# Altium PCB control.PcbDoc
Units mm, origin at the board's own origin, x right, y up, seen from the top; angles counter-clockwise.
Board outline 64.25 x 89.45 mm, 2 copper layers (Top Layer, Bottom Layer), stack 1.569 mm thick; 78 components, 61 nets, 284 pads, 134 vias.
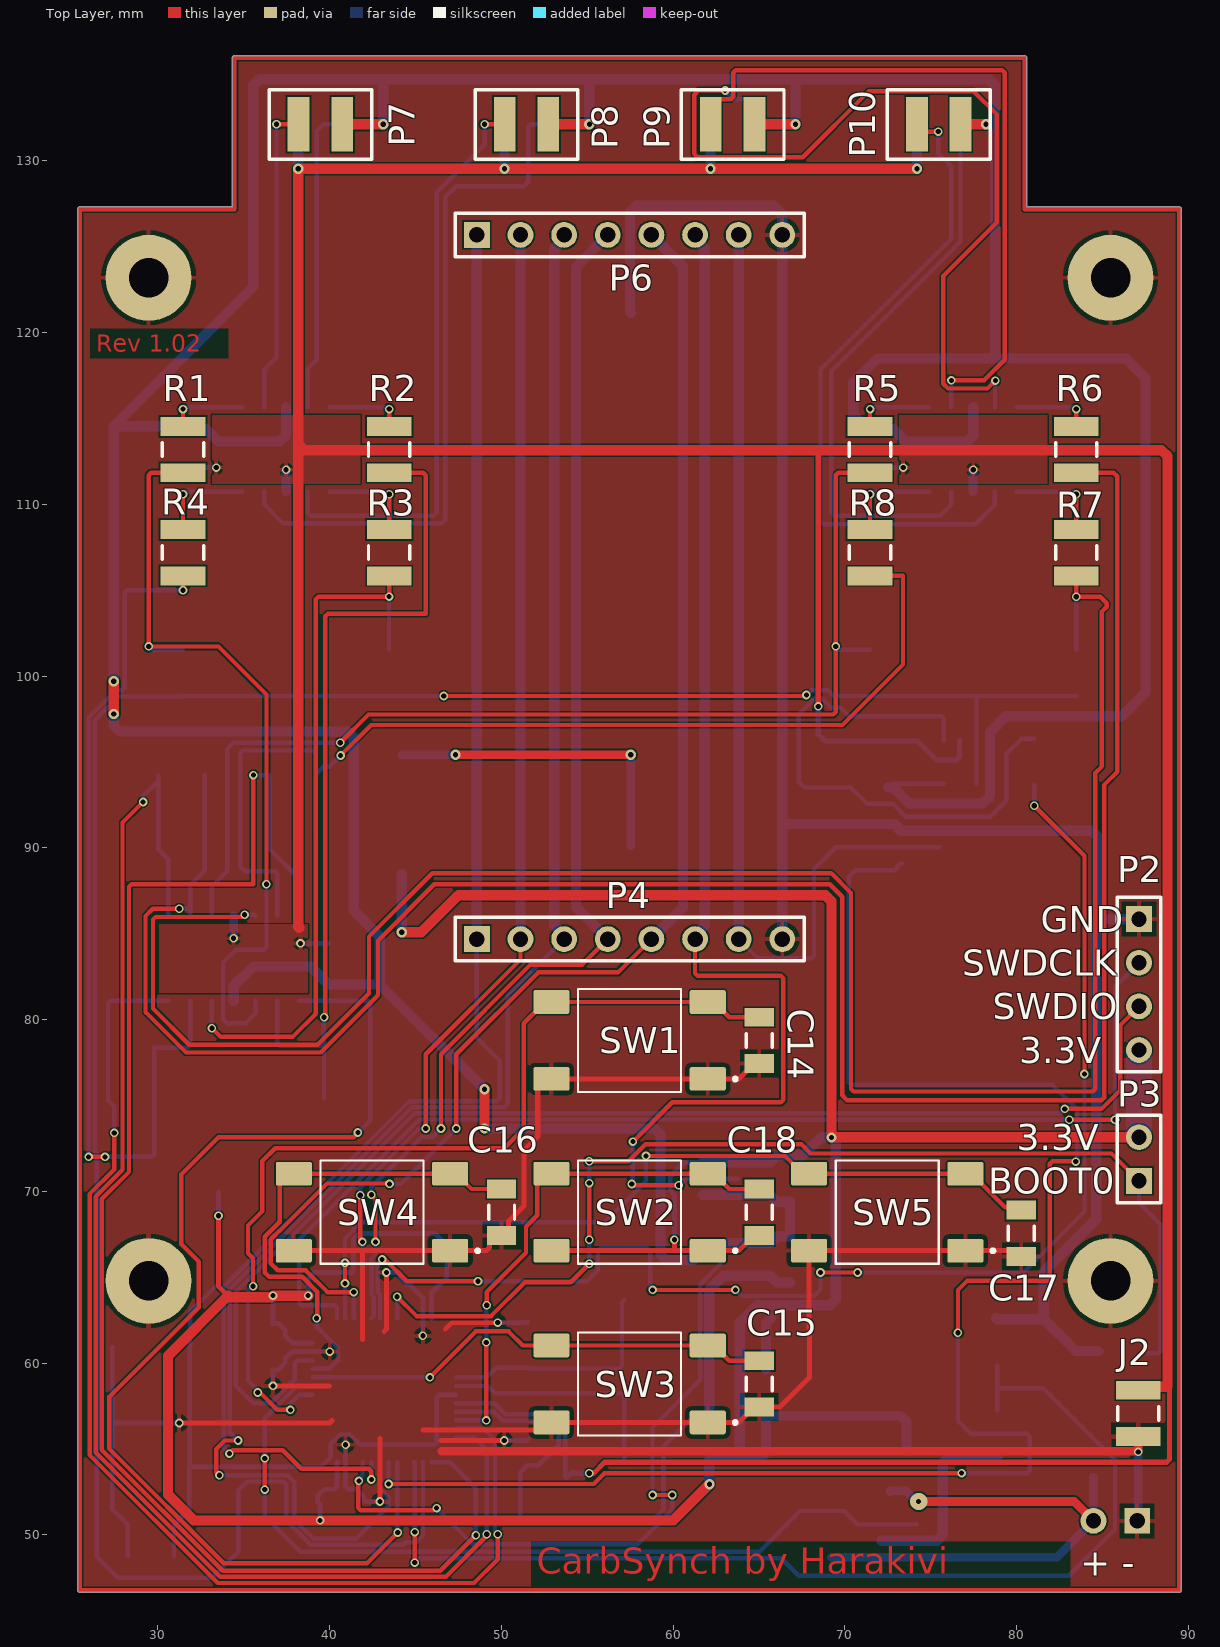
[diagram p0: Top Layer view]
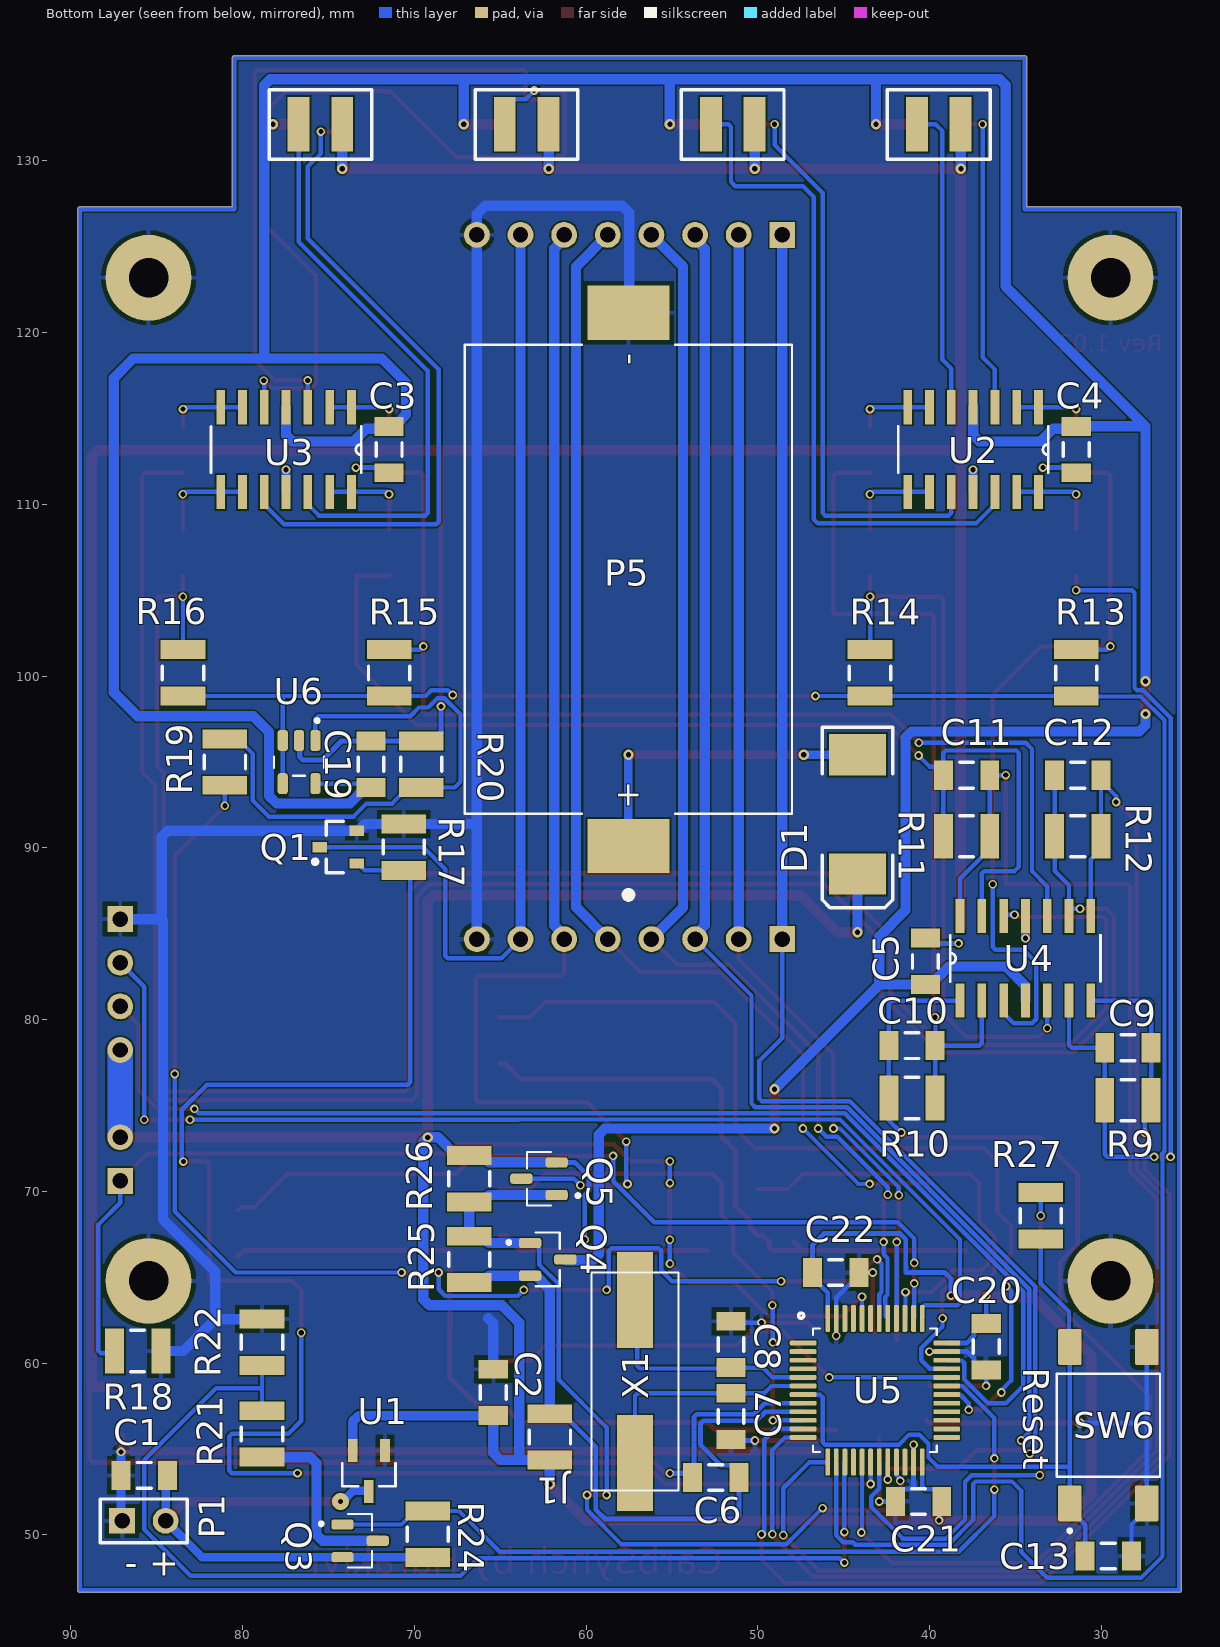
[diagram p1: Bottom Layer view, seen from below]

## Layer stack, top to bottom
Top Solder: solder mask 0.0254, SM-002, Dk 4
Top Layer: signal copper 0.035
Dielectric 1: core 1.4986, Core-043, Dk 4.3
Bottom Layer: signal copper 0.035
Bottom Solder: solder mask 0.0254, SM-002, Dk 4

## Board outline
25.337,46.79 25.337,127.19 cw(c25.464,127.19) 25.464,127.317 34.337,127.317 34.337,135.99 cw(c34.464,135.99) 34.464,136.117 80.464,136.117 cw(c80.464,135.99) 80.591,135.99 80.591,127.317 89.464,127.317 cw(c89.464,127.19) 89.591,127.19 89.591,46.79 cw(c89.464,46.79) 89.464,46.663 25.464,46.663 cw(c25.464,46.79)

## Design rules (kind name [scope] priority, off if disabled: settings)
Clearance [All] p1: gap=0.1 ignorepadtopadclearanceinfootprint=TRUE
DiffPairsRouting [All] p1: maxlimit=1 minlimit=0.1 mostfreqgap=0.254 toplayer_minwidth=0.1 toplayer_maxwidth=1 toplayer_prefwidth=0.381 bottomlayer_minwidth=0.1 bottomlayer_maxwidth=1 bottomlayer_prefwidth=0.381 maxuncoupledlength=12.7
PolygonConnect [All] p1: connectstyle=Relief reliefconductorwidth=0.254 reliefentries=4 polygonreliefangle="90 Angle" airgapwidth=0.254
RoomDefinition control [InComponentClass('control')] p1: confinementstyle=ConfineIn formatcopy=TRUE lockcomponents=FALSE outline 25.4,46.736 89.535,46.736 89.535,135.99 25.4,135.99
RoutingVias [All] p1: holewidth=0.254 width=0.7 viastyle="Through Hole" minholewidth=0.1 minwidth=0.1 maxholewidth=0.711 maxwidth=1.27
SilkToSilkClearance [All] p1: silktosilkclearance=0.1
SolderMaskExpansion [All] p1: expansion=0.102 istentingtop=FALSE
Width Width_V3.3 [InNet('V3.3')] p1: maxlimit=1.5 minlimit=0.1 preferedwidth=0.7 bottomlayer_prefwidth=0.254 minimp=50.000000 maximp=50.000000 favimp=50.000000
Width Width_GND [InNet('GND')] p2: maxlimit=1.5 minlimit=0.1 preferedwidth=0.7 bottomlayer_prefwidth=0.254 minimp=50.000000 maximp=50.000000 favimp=50.000000
Width [All] p3: maxlimit=1.5 minlimit=0.1 preferedwidth=0.254
28 further rules are at their usual default settings.

## Components (designator, comment, footprint, x,y, rotation, side; value= is the part's Value field where it differs from the comment)
C1 "Cap Semi" C1206 85.725,53.467 r180 bottom value=10uF
C2 "Cap Semi" C1206 65.405,58.293 r270 bottom value=1uF
C3 "Cap Semi" C1206 71.464,113.19 r90 bottom locked value=10uF
C4 "Cap Semi" C1206 31.464,113.19 r90 bottom locked value=10uF
C5 "Cap Semi" C1206 40.243,83.392 r270 bottom value=10uF
C6 "Cap Semi" C1206 52.451,53.34 r180 bottom value=10uF
C7 "Cap Semi" C1206 51.562,56.896 r90 bottom value=12pF
C8 "Cap Semi" C1206 51.562,61.087 r270 bottom value=12pF
C9 "Cap Semi" C1206 28.448,78.359 r0 bottom value=100pF
C10 "Cap Semi" C1206 41.021,78.486 r180 bottom value=100pF
C11 "Cap Semi" C1206 37.846,94.234 r0 bottom value=100pF
C12 "Cap Semi" C1206 31.369,94.234 r0 bottom value=100pF
C13 "Cap Semi" C1206 29.591,48.768 r0 bottom value=100nF
C14 "Cap Semi" C1206 65.014,78.79 r90 top locked value=100nF
C15 "Cap Semi" C1206 65.014,58.79 r90 top locked value=100nF
C16 "Cap Semi" C1206 50.014,68.79 r90 top locked value=100nF
C17 "Cap Semi" C1206 80.264,67.564 r90 top value=100nF
C18 "Cap Semi" C1206 65.014,68.79 r90 top locked value=100nF
C19 "Cap Semi" C1206 72.517,94.869 r90 bottom value=10uF
C20 "Cap Semi" C1206 36.703,60.96 r90 bottom value=10uF
C21 "Cap Semi" C1206 40.64,51.943 r180 bottom value=10uF
C22 "Cap Semi" C1206 45.466,65.278 r0 bottom value=10uF
D1 "Diode" SMC 44.196,91.948 r270 bottom
J1 "Res3" 14-1210 62.105,55.706 r90 bottom value=0
J2 "Res3" 14-1210 87.075,57.073 r270 top value=0
P1 "BatteryCon" HDR1X2 87.015,50.82 r180 bottom
P2 "Debug" HDR1X4 87.122,85.852 r270 top
P3 "BOOT0" HDR1X2 87.122,70.612 r90 top
P4 "DisplayPort" HDR1X8 48.574,84.69 r0 top locked
P5 "796136-1" TE_796136-1 57.531,105.638 r90 bottom locked
P6 "DisplayPort" HDR1X8 48.574,125.69 r0 top locked
P7 "Conn" CONNFOOT 40.733,132.128 r0 top locked
P8 "Conn" CONNFOOT 52.733,132.128 r0 top locked
P9 "Conn" CONNFOOT 64.733,132.128 r0 top locked
P10 "Conn" CONNFOOT 76.733,132.128 r0 top locked
Q1 "IRLML0030TRPBF" SOT23_L 74.422,90.043 r0 bottom
Q3 "IRLML9301TRPBF" SOT95P237X112-3N 73.152,49.657 r180 bottom
Q4 "IRLML9301TRPBF" SOT95P237X112-3N 62.23,66.04 r180 bottom
Q5 "IRLML9301TRPBF" SOT95P237X112-3N 62.738,70.739 r0 bottom
R1 "Res3" 14-1210 31.464,113.19 r90 top locked value=1K
R2 "Res3" 14-1210 43.464,113.19 r90 top locked value=1K
R3 "Res3" 14-1210 43.464,107.19 r90 top locked value=1K
R4 "Res3" 14-1210 31.464,107.19 r90 top locked value=1K
R5 "Res3" 14-1210 71.464,113.19 r90 top locked value=1K
R6 "Res3" 14-1210 83.464,113.19 r90 top locked value=1K
R7 "Res3" 14-1210 83.464,107.19 r90 top locked value=1K
R8 "Res3" 14-1210 71.464,107.19 r90 top locked value=1K
R9 "Res3" 14-1210 28.448,75.311 r0 bottom value=1K
R10 "Res3" 14-1210 41.021,75.438 r180 bottom value=1K
R11 "Res3" 14-1210 37.846,90.678 r0 bottom value=1K
R12 "Res3" 14-1210 31.369,90.678 r0 bottom value=1K
R13 "Res3" 14-1210 31.464,100.19 r90 bottom value=1k
R14 "Res3" 14-1210 43.464,100.19 r90 bottom value=1k
R15 "Res3" 14-1210 71.464,100.19 r90 bottom value=1k
R16 "Res3" 14-1210 83.464,100.19 r270 bottom value=1k
R17 "Res3" 14-1210 70.612,90.043 r270 bottom value=10k
R18 "Res3" 14-1210 86.106,60.706 r0 bottom value=100k
R19 "Res3" 14-1210 81.026,94.996 r270 bottom value=10k
R20 "Res3" 14-1210 69.596,94.869 r270 bottom value=10k
R21 "Res3" 14-1210 78.867,55.88 r270 bottom value=50K
R22 "Res3" 14-1210 78.867,61.214 r270 bottom value=50K
R24 "Res3" 14-1210 69.215,50.038 r90 bottom value=10k
R25 "Res3" 14-1210 66.802,66.04 r90 bottom value=10k
R26 "Res3" 14-1210 66.802,70.739 r270 bottom value=10k
R27 "Res3" 14-1210 33.528,68.58 r270 bottom value=10k
SW1 "Up" TE_FSM4JSMA 57.464,78.79 r180 top locked
SW2 "Enter" TE_FSM4JSMA 57.464,68.79 r180 top locked
SW3 "Down" TE_FSM4JSMA 57.464,58.79 r180 top locked
SW4 "Left" TE_FSM4JSMA 42.464,68.79 r180 top locked
SW5 "Right" TE_FSM4JSMA 72.464,68.79 r180 top locked
SW6 "Reset" TE_FSM4JSMA 29.591,56.388 r90 bottom locked
U1 "MCP1702T-3302E/CB" SOT95P255X145-3N 72.644,53.721 r0 bottom
U2 "LM324AD" SOIC127P600X175-14N 37.464,113.19 r270 bottom locked
U3 "LM324AD" SOIC127P600X175-14N 77.464,113.19 r270 bottom locked
U4 "LM324AD" SOIC127P600X175-14N 34.417,83.566 r90 bottom
U5 "STM32F103C8T6" QFP50P900X900X160-48N 43.18,58.42 r180 bottom locked
U6 "LMV321M5" SOT95P280X145-5N 76.708,94.996 r270 bottom
X1 "ABLS-8.000MHZ-B4-T" HC-49/US 57.15,58.928 r270 bottom

## Footprints (in the part's own frame and the unit in brackets; to place one, negate y for a bottom-side part, rotate by r counter-clockwise, add the part's x,y. Pads: shape width x height; smd on the part's side, far side on the other; paste and mask are expansions set on the pad)
14-1210 [mm] "Chip Resistor, Body 3.2x2.5mm, IPC High Density"
  rect 1.1x2.6 smd: 1(-1.35,0) 2(1.35,0)
  silkscreen extent -0.4,-1.2 0.4,1.2, body extent -1.68,-1.32 1.68,1.32, height 0.9
C1206 [mm] "Chip Capacitor, Body 3.2x1.6mm, IPC High Density"
  rect 1.1x1.7 smd: 1(-1.35,0) 2(1.35,0)
  silkscreen extent -0.4,-0.75 0.4,0.75, body extent -1.7,-0.9 1.7,0.9, height 1.3
CONNFOOT [mm]
  rect 1.27x3.18 smd: 1(-2.54,0) 2(0,0)
  rect 1.27x3.18 smd far side: 3(-2.54,0) 4(0,0)
  silkscreen extent -4.26,-2.04 1.72,2.02
HC-49/US [mil]
  rect 220x83 smd: P$1(187,0) P$2(-187,0)
  silkscreen extent -250,-100 250,100
HDR1X2 [mm] "Connector; Header; 2 Position"
  rect 1.5x1.5 hole 0.9: 1(0,0)
  round 1.5 hole 0.9: 2(2.54,0)
  silkscreen extent -1.27,-1.27 3.81,1.27
HDR1X4 [mm] "Connector; Header; 4 Position"
  rect 1.5x1.5 hole 0.9: 1(0,0)
  round 1.5 hole 0.9: 2(2.54,0) 3(5.08,0) 4(7.62,0)
  silkscreen extent -1.27,-1.27 8.89,1.27
HDR1X8 [mm] "Connector; Header; 8 Position"
  rect 1.5x1.5 hole 0.9: 1(0,0)
  round 1.5 hole 0.9: 2(2.54,0) 3(5.08,0) 4(7.62,0) 5(10.16,0) 6(12.7,0) 7(15.24,0) 8(17.78,0)
  silkscreen extent -1.27,-1.27 19.05,1.27
QFP50P900X900X160-48N [mm]
  rrect50% 1.56x0.28 smd: 1(-4.18,2.75) 2(-4.18,2.25) 3(-4.18,1.75) 4(-4.18,1.25) 5(-4.18,0.75) 6(-4.18,0.25) 7(-4.18,-0.25) 8(-4.18,-0.75) 9(-4.18,-1.25) 10(-4.18,-1.75) 11(-4.18,-2.25) 12(-4.18,-2.75) 25(4.18,-2.75) 26(4.18,-2.25) 27(4.18,-1.75) 28(4.18,-1.25) 29(4.18,-0.75) 30(4.18,-0.25) 31(4.18,0.25) 32(4.18,0.75) 33(4.18,1.25) 34(4.18,1.75) 35(4.18,2.25) 36(4.18,2.75)
  rrect50% 0.28x1.56 smd: 13(-2.75,-4.18) 14(-2.25,-4.18) 15(-1.75,-4.18) 16(-1.25,-4.18) 17(-0.75,-4.18) 18(-0.25,-4.18) 19(0.25,-4.18) 20(0.75,-4.18) 21(1.25,-4.18) 22(1.75,-4.18) 23(2.25,-4.18) 24(2.75,-4.18) 37(2.75,4.18) 38(2.25,4.18) 39(1.75,4.18) 40(1.25,4.18) 41(0.75,4.18) 42(0.25,4.18) 43(-0.25,4.18) 44(-0.75,4.18) 45(-1.25,4.18) 46(-1.75,4.18) 47(-2.25,4.18) 48(-2.75,4.18)
  silkscreen extent -4.45,-3.6 3.6,4.49
SMC [mm] "DO-214-AB/SMC; 2 C-Bend Leads; Body 7.9 x 5.9 mm, inc. leads (LxW)"
  rect 2.4x3.3 smd: 1(-3.475,0) 2(3.475,0)
  silkscreen extent -5.07,-2.05 5.43,2.05
SOIC127P600X175-14N [mil]
  rect 78x20 smd: 1(-97,150) 2(-97,100) 3(-97,50) 4(-97,0) 5(-97,-50) 6(-97,-100) 7(-97,-150) 8(97,-150) 9(97,-100) 10(97,-50) 11(97,0) 12(97,50) 13(97,100) 14(97,150)
  silkscreen extent -53,-172 53,172
SOT23_L [mm] "SOT23, 3-Leads, Body 2.9x1.3mm, Pitch 0.95mm, Lead Span 2.3mm - Reverse Pinning, IPC High Density"
  rect 0.85x0.6 smd: 1(1.075,0) 2(-1.075,-0.95) 3(-1.075,0.95)
  silkscreen extent -0.3,-1.5 1.48,1.5, body extent -0.7,-1.5 0.7,1.5, height 1.1
SOT95P237X112-3N [mm]
  rrect50% 1.3x0.59 smd: 1(-1.025,0.95) 2(-1.025,-0.95) 3(1.025,0)
  silkscreen extent -2.37,-1.56 0.7,1.56
SOT95P255X145-3N [mil]
  rect 22x52 smd: 1(-37,-47) 2(37,-47) 3(0,47)
  silkscreen extent -61,-18 61,35
SOT95P280X145-5N [mm]
  rrect50% 1.21x0.59 smd: 1(-1.255,0.95) 2(-1.255,0) 3(-1.255,-0.95) 4(1.255,-0.95) 5(1.255,0.95)
  silkscreen extent -2.51,-1.45 0.8,1.45
TE_796136-1 [mm]
  rect 3.15x4.78 smd: 1(-15.52,0) 2(15.52,0)
  silkscreen extent -18.57,-9.53 13.65,9.53
TE_FSM4JSMA [mm]
  rrect15% 2.1x1.38 smd: 1(-4.55,2.24) 2(4.55,2.24) 3(-4.55,-2.24) 4(4.55,-2.24)
  silkscreen extent -6.25,-3 3,3, body extent -5,-3 5,3, height 7.06

## Part data
C1 C2 C3 C4 C5 C6 C7 C8 C9 C10 C11 C12 C13 C14 C15 C16 C17 C18 C19 C20 C21 C22: "Capacitor (Semiconductor SIM Model)", LatestRevisionDate=29-May-2009, LatestRevisionNote="IPC-7351 Footprint Added.", PackageDescription="Chip Capacitor", PackageReference=C1206, Published=8-Jun-2000, Publisher="Altium Limited"
D1: "Default Diode", Code_JEDEC=DO-214-AB, LatestRevisionDate=17-Jul-2002, LatestRevisionNote="Re-released for DXP Platform.", PackageDescription="DO-214-AB/SMC; 2 C-Bend Leads; Body 7.9 x 5.9 mm, inc. leads (LxW)", PackageReference=SMC, PackageVersion=Sep-1996, Published=8-Jun-2000, Publisher="Altium Limited"
J1 J2 R1 R2 R3 R4 R5 R6 R7 R8 R9 R10 R11 R12 R13 R14 R15 R16 R17 R18 R19 R20 R21 R22 R24 R25 R26 R27: "Resistor", LatestRevisionDate=29-May-2009, LatestRevisionNote="IPC-7351 Footprint Added.", PackageDescription="Chip Resistor", PackageReference=J1-0603, Published=8-Jun-2000, Publisher="Altium Limited"
P1 P3: library part "Header 2", "Header, 2-Pin", LatestRevisionDate=17-Jul-2002, LatestRevisionNote="Re-released for DXP Platform.", Publisher="Altium Limited"
P2: library part "Header 4", "Header, 4-Pin", LatestRevisionDate=17-Jul-2002, LatestRevisionNote="Re-released for DXP Platform.", Publisher="Altium Limited"
P4 P6: library part "Header 8", "Header, 8-Pin", LatestRevisionDate=17-Jul-2002, LatestRevisionNote="Re-released for DXP Platform.", Publisher="Altium Limited"
P5: "BATTERY HOLDER; No. of Batteries:1; Terminal Type:Surface Mount; For Use With:CR2032 Batteries; Accessory Type:Battery Holder; Battery Size Code:2032", Package=None, Availability=Unavailable, EU_RoHS_Compliance=Compliant, MF="TE Connectivity", MP=796136-1, Number_of_Positions=2, Price=None, SnapEDA_Link=https://www.snapeda.com/parts/796136-1/TE%20Connectivity%20AMP%20Connectors/view-part/761452/?ref=snap, TE_purchase_URL=https://www.te.com/usa-en/product-796136-1.html?te_bu=Cor&te_type=disp&te_campaign=seda_glo_cor-seda-global-disp-prtnr-fy19-seda-model-bom-cta_sma-317_1&elqCampaignId=32493
P7 P8 P9 P10: library part ConnectorSMD
Q1: "N-Channel 30V 5.3A _Ta_ 1.3W _Ta_ Surface Mount Micro3â„¢/SOT-23", Package="SOT-23 International Rectifier", Availability=Unavailable, MF="Infineon Technologies", MP=IRLML0030TRPBF, Price=None, SnapEDA_Link=https://www.snapeda.com/parts/IRLML0030TRPBF/Infineon%20Technologies/view-part/246217/?ref=snap
Q3 Q4 Q5: "RoHS Compliant", Package="SOT-23 Infineon", Availability=Unavailable, MF="Infineon Technologies", MP=IRLML9301TRPBF, Price=None, SnapEDA_Link=https://www.snapeda.com/parts/IRLML9301TRPBF/Infineon%20Technologies/view-part/2598123/?ref=snap
SW1 SW2 SW3 SW4 SW5 SW6: library part FSM4JSMA, "Tactile Switch SPST-NO Top Actuated Surface Mount", Contact_Current_Rating="50 mA", Package=None, Availability=Unavailable, Configuration_Pole-Throw="Single Pole - Single Throw", EU_RoHS_Compliance=Compliant, MF="TE Connectivity", MP=FSM4JSMA, Price=None, SnapEDA_Link=https://www.snapeda.com/parts/FSM4JSMA/TE%20Connectivity%20ALCOSWITCH%20Switches/view-part/543632/?ref=snap, TE_purchase_URL=https://www.te.com/usa-en/product-4-1437565-1.html?te_bu=Cor&te_type=disp&te_campaign=seda_glo_cor-seda-global-disp-prtnr-fy19-seda-model-bom-cta_sma-317_1&elqCampaignId=32493
U1: "Linear Voltage Regulator IC Positive Fixed 1 Output 250mA SOT-23A-3", Package=None, Availability="In Stock", Check_prices=https://www.snapeda.com/parts/MCP1702T-3302E/CB/Atmel/view-part/?ref=eda, MF="Microchip Technology", MP=MCP1702T-3302E/CB, Price=None, Purchase-URL=https://pricing.snapeda.com/search/part/MCP1702T-3302E/CB/?ref=eda, SnapEDA_Link=https://www.snapeda.com/parts/MCP1702T-3302E/CB/Atmel/view-part/?ref=snap
U2 U3 U4: "Op Amp Quad Low Power Amplifier Â±15V/30V 14-Pin SOIC Tube", Package=None, Availability=Unavailable, MF="Texas Instruments", MP=LM324AD, Price=None, SnapEDA_Link=https://www.snapeda.com/parts/LM324AD/Texas%20Instruments/view-part/4804679/?ref=snap
U5: "ARMÂ® CortexÂ®-M3 STM32F1 Microcontroller IC 32-Bit 72MHz 64KB _64K x 8_ FLASH", Package="LQFP-48 STMicroelectronics", Availability=Unavailable, MF=STMicroelectronics, MP=STM32F103C8T6, Price=None, SnapEDA_Link=https://www.snapeda.com/parts/STM32F103C8T6/STMicroelectronics/view-part/52195/?ref=snap
U6: "Single channel general purpose, low voltage, rail-to-rail output operational amplifiers 5-SOT-23 -40 to 125", Package="SOT-23-5 Texas Instruments", Arrow_Electronics-Purchase-URL=https://snapeda.com/shop?store=Arrow+Electronics&id=16808, Availability=Good, Check_prices=https://www.snapeda.com/parts/LMV321M5/NOPB/Texas%20Instruments/view-part/16808/?ref=eda, DigiKey-Purchase-URL=https://snapeda.com/shop?store=DigiKey&id=16808, MF="Texas Instruments", Mouser-Purchase-URL=https://snapeda.com/shop?store=Mouser&id=16808, MP=LMV321M5/NOPB, Price=None, SnapEDA_Link=https://www.snapeda.com/parts/LMV321M5/NOPB/Texas%20Instruments/view-part/16808/?ref=snap, Texas_Instruments-Purchase-URL=https://snapeda.com/shop?store=Texas+Instruments&id=16808
X1: "8MHz Â±30ppm Crystal 18pF 80 Ohms HC-49/US", Package="HC-49/US Abracon LLC", Availability=Unavailable, MF="Abracon LLC", MP=ABLS-8.000MHZ-B4-T, Price=None, SnapEDA_Link=https://www.snapeda.com/parts/ABLS-8.000MHZ-B4-T/Abracon%20LLC/view-part/306310/?ref=snap

## Free pads (board coordinates)
  round 5 hole 2.3: 1(29.464,64.79) 1(29.464,123.19) 1(85.464,64.79) 1(85.464,123.19)

## Via types
v1: diameter 0.5, hole 0.3, Top Layer to Bottom Layer, 116 vias
v2: diameter 0.6, hole 0.3, Top Layer to Bottom Layer, 17 vias
v3: diameter 1, hole 0.3, Top Layer to Bottom Layer, 1 vias

## Nets (pads, with @x,y where several pads share a name; then routed paths per layer and width w, separated by ;. In a path a pad name is that pad's centre, name@x,y a point inside that pad or via, vN(x,y) a via of type N, cw(c..) or ccw(c..) an arc to the next point about the centre after c; other vN are vias at no path point)
CE: P4.2 P6.2 U5.40 | length 67.2
  Top Layer w0.254: v1(41.783,69.772) 41.783,67.183 v1(41.91,67.056) ; v1(45.593,73.66) 45.593,77.978 51.114,83.499 P4.2
  Bottom Layer w0.254: v1(41.783,69.772) 41.783,70.231 45.211,73.659 v1(45.593,73.66) v1(45.593,73.66) ; v1(41.91,67.056) 41.91,62.62 U5.40
  Bottom Layer w0.6: P4.2 P6.2
CLK: P4.5 P6.5 U5.39 | length 82.9
  Top Layer w0.254: v1(41.402,64.135) 39.872,64.135 38.602,65.405 36.979,65.405 36.576,65.808 36.576,67.183 36.637,67.244 36.637,67.273 37.055,67.691 37.084,67.691 39.851,70.458 43.461,70.458 v1(43.486,70.433) ; v1(47.371,73.66) 47.371,77.978 52.142,82.749 56.793,82.749 P4.5
  Bottom Layer w0.254: v1(41.402,64.135) 41.402,62.628 U5.39 ; v1(43.486,70.433) 44.144,70.433 v1(47.371,73.66)
  Bottom Layer w0.6: P4.5 60.579,86.535 60.579,123.845 P6.5
DC: P4.3 P6.3 U5.19 | length 100.9
  Top Layer w0.254: v1(33.584,53.471) 33.405,53.65 33.405,55.004 33.9,55.499 v1(34.671,55.499)
  Bottom Layer w0.254: v1(33.584,53.471) 33.588,53.467 37.563,53.467 37.933,53.097 37.933,50.897 39.046,49.784 41.552,49.784 43.403,51.635 43.403,52.228 42.93,52.701 U5.19 ; v1(34.671,55.499) 34.19,55.98 34.19,64.303 44.79,74.903 50.143,74.903 50.365,75.125 50.365,81.401 P4.3
  Bottom Layer w0.6: P4.3@53.654,84.916 53.079,85.491 53.079,124.889 P6.3@53.654,125.464
DIN: P4.4 P6.4 U5.41 | length 72.8
  Top Layer w0.254: v1(42.43,69.802) 42.672,69.56 v1(42.672,67.056) ; v1(46.482,73.66) 46.482,77.986 51.699,83.203 54.707,83.203 P4.4
  Bottom Layer w0.254: U5.41 42.563,62.733 42.563,63.433 42.576,63.446 42.576,63.857 42.445,63.988 42.445,66.107 42.672,66.334 v1(42.672,67.056) ; v1(42.43,69.802) 42.43,70.243 45.37,73.183 46.005,73.183 v1(46.482,73.66)
  Bottom Layer w0.6: P4.4 54.349,86.535 54.349,123.845 P6.4
dispPWR: P4.6 P6.6 Q5.3 | length 74.4
  Top Layer w0.254: v1(57.587,70.429) 57.658,70.358 v1(60.325,70.358) ; v1(57.658,72.895) 59.947,75.184 66.272,75.184 66.421,75.333 66.421,82.401 66.272,82.55 61.423,82.55 61.274,82.699 P4.6
  Bottom Layer w0.254: v1(57.587,70.429) 57.658,70.499 v1(57.658,72.895) ; v1(60.325,70.358) 60.706,70.739 Q5.3
  Bottom Layer w0.6: P4.6 61.274,84.916 61.849,85.491 61.849,124.889 61.274,125.464 P6.6
dispRES: P4.1 P6.1 U5.20 | length 91.6
  Top Layer w0.254: v1(34.163,54.737) 34.355,54.929 37.273,54.929 38.354,53.848 42.281,53.848 42.43,53.699 v1(42.43,53.225)
  Bottom Layer w0.254: v1(34.163,54.737) 33.836,55.064 33.836,64.45 44.643,75.257 49.762,75.257 49.911,75.406 49.911,77.597 48.574,78.934 P4.1 ; v1(42.43,53.225) U5.20
  Bottom Layer w0.6: P4.1 P6.1
divbatVolt: R21.1 R22.2 U5.15 | length 63.5
  Top Layer w0.254: v1(44.958,48.387) v1(44.958,50.165)
  Bottom Layer w0.254: U5.15 44.958,54.212 v1(44.958,50.165) ; v1(44.958,48.387) 44.976,48.387 45.23,48.641 66.294,48.641 67.31,47.625 83.031,47.625 85.725,50.319 85.725,54.356 81.534,58.547 78.867,58.547 ; R21.1 78.867,58.547 ; R22.2 78.867,58.547
FirstStepBatt: Q3.1 R24.2 U5.31 | length 49.4
  Top Layer w0.254: v1(36.222,52.636) v1(36.222,54.452)
  Bottom Layer w0.254: v1(36.222,52.636) 36.222,51.106 38.306,49.022 65.024,49.022 67.39,51.388 R24.2 69.965,51.388 70.746,50.607 Q3.1 ; v1(36.222,54.452) 36.222,56.796 38.093,58.667 38.997,58.667 U5.31
GND: C1.1 C2.1 C7.1 C8.1 C13.1 C14.1 C15.1 C16.1 C17.1 C20.1 C21.1 C22.1 J2.2 P1.1 P2.1 P4.8 P5.2 P6.8 pad.1 Q1.2 R17.1 R18.1 R22.1 SW1.1 SW1.2 SW3.1 SW3.2 SW4.1 SW4.2 SW5.1 SW5.2 SW6.3 SW6.4 U1.1 U5.23 U5.35 U5.47 | length 310.9
  Top Layer w0.28: v1(36.703,58.674) 40.005,58.674 ; v1(42.926,51.943) 42.926,55.626 ; 43.18,61.849 43.307,61.976 v1(43.307,65.278) ; 46.482,55.499 v1(50.165,55.499) ; 46.736,61.976 47.117,62.357 v1(49.784,62.357) ; SW5.1 79.928,66.55 C17.1
  Top Layer w0.3: v1(31.242,56.515) 40.012,56.515 40.139,56.642 ; SW4.2 41.91,66.55 ; 41.91,61.391 41.91,66.55 ; 45.447,56.1 52.464,56.1 SW3.2 SW3.1 63.824,56.55 64.714,57.44 C15.1 66.203,57.44 67.945,59.182 67.945,62.009 67.914,62.04 SW5.2 SW5.1 ; SW4.1@47.914,67.09 SW4.1@47.374,66.55 ; C14.1 64.714,77.44 63.824,76.55 SW1.1 SW1.2 52.657,76.55 52.117,76.01 52.117,73.199 51.308,72.39 51.308,69.155 50.418,68.264 50.418,67.84 50.018,67.44 C16.1 49.714,67.44 49.314,67.04 49.314,66.74 49.124,66.55 SW4.1@47.374,66.55 ; 41.91,66.55 SW4.1 SW4.1@47.374,66.55
  Top Layer w0.5: 46.526,54.864 87.041,54.864 v1(87.075,54.83) J2.2@87.075,55.723
  Bottom Layer w0.254: SW6.4 27.351,56.642 SW6.3 27.351,51.478 28.241,50.588 C13.1 ; P1.1 P1.1@87.075,50.88
  Bottom Layer w0.28: v1(36.703,58.674) C20.1 37.003,59.61 37.413,60.02 37.413,60.283 37.8,60.67 U5.35 v1(40.009,60.67) ; v1(40.93,55.249) U5.23 40.93,52.83 41.094,52.666 41.416,52.666 41.429,52.653 41.58,52.653 41.99,52.243 41.99,51.943 v1(42.926,51.943) ; v1(43.307,65.278) C22.1 44.116,64.978 44.526,64.568 44.662,64.568 45.43,63.8 U5.47 v1(45.43,61.591) ; v1(49.784,62.357) 51.482,62.357 C8.1@51.538,62.414 ; v1(50.165,55.499) 51.515,55.499 C7.1
  Bottom Layer w0.3: 27.351,56.642 27.478,56.515 v1(31.242,56.515)
  Bottom Layer w0.5: pad.1@85.464,64.817 87.122,64.817 pad.1@87.075,64.77 ; P1.1@87.075,50.88 C1.1 v1(87.075,54.83)
  Bottom Layer w0.6: P5.2 57.484,121.205 57.484,126.983 57.882,127.381 65.868,127.381 66.354,126.895 P6.8 66.354,91.33 ; C2.1 65.405,62.322 65.698,62.615 ; P4.8 66.354,91.33 ; R22.1@78.816,62.615 R22.1 81.581,62.564 ; R18.1 83.439,60.706 81.581,62.564 ; P2.1 84.709,85.852 ; 66.354,91.33 66.417,91.393 R17.1 72.896,91.393 73.072,91.217 73.072,91.143 73.222,90.993 Q1.2 84.358,90.993 84.709,90.642 84.709,85.852 ; 81.581,62.564 81.581,65.325 84.632,68.376 84.632,85.775 84.709,85.852
GNDA: C3.1 C4.1 C5.1 C6.1 C19.2 J2.1 P7.3 P8.3 P9.3 P10.3 R20.1 U2.11 U3.11 U4.11 U5.8 U6.2 | length 283.2
  Top Layer w0.3: v1(55.118,53.594) 55.372,53.594 56.007,54.229 88.724,54.229 88.9,54.405 88.9,58.52 88.786,58.635 ; v1(68.446,98.24) 68.446,113.157
  Top Layer w0.6: 38.227,85.344 38.178,85.393 38.178,113.508 ; v2(74.193,129.54) v2(62.175,129.54) v2(50.176,129.54) v2(38.178,129.54) 38.178,113.508 ; J2.1 87.287,58.635 88.786,58.635 88.786,112.806 88.434,113.157 68.446,113.157 38.529,113.157 38.178,113.508
  Bottom Layer w0.28: U5.8 49.589,57.67 50.236,57.023 53.557,57.023 53.721,56.859 C6.1@53.721,53.42
  Bottom Layer w0.3: C4.1@31.638,112.014 31.765,112.141 v1(33.401,112.141) ; v1(38.306,84.441) C5.1@39.942,84.441 ; C6.1@53.721,53.42 C6.1 54.055,53.594 v1(55.118,53.594) ; v1(68.446,98.24) 68.446,97.65 68.446,96.619 68.846,96.219 R20.1 C19.2 74.232,96.219 75.328,95.123 76.496,95.123 76.671,95.299 76.671,96.214 U6.2 ; C3.1@71.765,112.141 v1(73.401,112.141)
  Bottom Layer w0.508: v1@34.417,84.748 U4.11 ; U2.11 v1@37.464,112.008 ; C3.1 C3.1@71.638,112.014 ; U3.11 77.464,112.008 v1(77.47,112.014)
  Bottom Layer w0.6: v2(38.178,129.54) 38.178,132.113 P7.3 ; v2(50.176,129.54) 50.176,132.111 P8.3 ; v2(62.175,129.54) 62.175,132.11 P9.3 ; v2(74.193,129.54) P10.3
  other v1: 34.411,84.742 37.47,112.014
Light: P4.7 P6.7 Q1.1 | length 58.8
  Bottom Layer w0.254: P4.7 64.938,83.566 68.05,83.566 68.199,83.715 68.199,88.773 69.469,90.043 Q1.1
  Bottom Layer w0.6: P4.7 P6.7
NetC7_2: C7.2 U5.6 X1.P$1 | length 13.9
  Bottom Layer w0.254: U5.6 49.207,58.67 49.631,58.246 C7.2 57.001,58.246 57.15,58.097 X1.P$1
NetC8_2: C8.2 U5.5 X1.P$2 | length 13.9
  Bottom Layer w0.254: U5.5 49.136,59.17 49.703,59.737 C8.2 51.609,59.69 56.874,59.69 57.023,59.839 57.023,63.551 X1.P$2
NetC9_1: C9.1 R9.1 U4.7 U5.11 | length 67.9
  Top Layer w0.254: v1(27.463,73.406) 27.463,71.278 26.027,69.842 26.027,54.657 33.482,47.202 48.411,47.202 49.784,48.575 v1(49.784,50.038)
  Bottom Layer w0.254: v1(27.463,73.406) 27.463,74.946 R9.1 C9.1 27.098,80.953 27.247,81.102 U4.7 ; U5.11 49.001,56.17 49.626,55.545 49.626,50.035 49.784,49.877 v1(49.784,50.038)
NetC9_2: C9.2 R4.1 R9.2 U4.6 | length 53
  Top Layer w0.254: v1(25.97,72.009) v1(26.924,72.009) ; v1(31.464,104.997) R4.1
  Bottom Layer w0.254: v1(25.97,72.009) 25.967,72.012 25.967,97.571 27.572,99.176 27.918,99.176 28.067,99.325 28.067,104.848 28.216,104.997 v1(31.464,104.997) ; v1(26.924,72.009) 29.649,72.009 29.798,72.158 C9.2 31.728,78.359 31.877,78.508 U4.6
NetC10_1: C10.1 R10.1 U4.1 U5.17 | length 66.3
  Top Layer w0.254: v1(41.646,73.429) 41.646,73.417 41.402,73.172 41.402,73.152 33.528,73.152 31.369,70.993 31.369,66.929 32.385,65.913 32.385,63.246 27.178,58.039 27.178,55.008 33.831,48.355 42.177,48.355 v1(43.965,50.142)
  Bottom Layer w0.254: U4.1 42.222,81.102 42.371,80.953 C10.1 R10.1 42.371,74.133 41.762,73.524 41.754,73.524 41.659,73.429 v1(41.646,73.429) ; U5.17 43.93,50.177 v1(43.965,50.142)
NetC10_2: C10.2 R2.1 R10.2 U4.2 | length 49.5
  Top Layer w0.254: v1(39.678,80.135) 39.678,80.148 39.701,80.171 39.701,80.191 39.751,80.241 39.751,103.483 39.9,103.632 45.593,103.632 45.593,111.691 45.444,111.84 R2.1
  Bottom Layer w0.254: U4.2 36.957,78.635 37.106,78.486 C10.2 ; R10.2 C10.2 ; v1(39.678,80.135) 39.655,80.112 39.655,78.502 C10.2
NetC11_1: C11.1 R11.1 U4.14 U5.13 | length 88.4
  Top Layer w0.254: v1(35.56,94.234) 35.56,87.884 28.47,87.884 28.321,87.735 28.321,71.135 26.737,69.551 26.737,54.948 33.775,47.91 46.44,47.91 v1(48.514,49.984)
  Bottom Layer w0.254: v1(35.56,94.234) C11.1 R11.1 36.496,89.928 38.227,88.197 U4.14 ; U5.13 46.989,54.24 48.514,52.715 v1(48.514,49.984)
NetC11_2: C11.2 R8.1 R11.2 U4.13 | length 64.7
  Top Layer w0.254: v1(40.64,95.377) 42.418,97.155 69.86,97.155 73.384,100.68 73.384,105.84 R8.1
  Bottom Layer w0.254: U4.13 36.957,88.497 36.808,88.646 35.052,88.646 34.798,88.9 34.798,95.517 34.947,95.666 39.047,95.666 39.196,95.517 C11.2 39.196,93.933 39.196,92.583 39.196,92.456 R11.2 ; C11.2@39.196,94.292 39.619,94.715 39.978,94.715 v1(40.64,95.377)
NetC12_1: C12.1 R12.1 U4.8 U5.12 | length 82.9
  Top Layer w0.254: v1(29.137,92.671) 27.94,91.474 27.94,71.254 26.383,69.697 26.383,54.801 33.628,47.556 46.761,47.556 49.149,49.944 v1(49.149,50.038)
  Bottom Layer w0.254: v1(29.137,92.671) 29.137,93.018 C12.1@30.019,93.9 ; C12.1 C12.1@30.019,93.9 ; U4.8 30.607,89.34 30.019,89.928 R12.1 C12.1@30.019,93.9 ; U5.12 48.419,55.67 49.149,54.94 v1(49.149,50.038)
NetC12_2: C12.2 R6.1 R12.2 U4.9 | length 131
  Top Layer w0.254: v1(31.242,86.456) 29.702,86.456 29.283,86.037 29.283,80.438 31.635,78.086 39.485,78.086 42.817,81.418 42.817,84.598 46.095,87.876 69.123,87.876 69.842,87.157 69.842,75.595 70.126,75.311 84.941,75.311 85.09,75.46 85.09,93.662 85.852,94.424 85.852,111.633 85.645,111.84 R6.1
  Bottom Layer w0.254: v1(31.242,86.456) 31.75,86.456 31.877,86.329 U4.9 31.877,87.827 32.719,88.669 R12.2 C12.2
NetC13_2: C13.2 R27.2 SW6.1 SW6.2 U5.7 | length 39.3
  Bottom Layer w0.254: C13.2 30.941,50.588 31.831,51.478 31.831,53.975 ; R27.2 33.528,64.643 31.877,62.992 31.877,60.984 SW6.2 31.846,60.923 31.846,53.99 31.831,53.975 ; U5.7 47.356,58.166 46.377,58.166 46.228,58.017 46.228,55.396 46.079,55.247 41.781,55.247 41.19,55.838 40.598,55.838 40.063,55.303 40.063,54.505 39.533,53.975 31.831,53.975
NetC14_2: C14.2 SW1.3 SW1.4 U5.30 | length 55.2
  Top Layer w0.254: v1(35.542,64.481) 35.542,66.11 35.251,66.401 35.251,68.017 36.068,68.834 36.068,71.755 36.83,72.517 50.165,72.517 51.308,73.66 51.308,79.784 52.554,81.03 SW1.4 SW1.3 62.374,81.03 63.264,80.14 C14.2 ; v1(35.814,58.293) 35.941,58.293 36.957,57.277 v1(37.719,57.277)
  Bottom Layer w0.254: v1(35.542,64.481) 35.53,64.481 35.271,64.222 35.251,64.222 35.251,58.983 35.814,58.42 v1(35.814,58.293) ; v1(37.719,57.277) 37.719,57.658 38.098,58.037 38.218,58.157 38.987,58.157 U5.30
NetC15_2: C15.2 SW3.3 SW3.4 U5.32 | length 27.8
  Top Layer w0.254: v1(45.835,59.17) 48.514,61.849 50.419,61.849 51.238,61.03 SW3.4 SW3.3 62.374,61.03 63.264,60.14 C15.2
  Bottom Layer w0.254: U5.32@39.012,59.182 U5.32 v1(45.835,59.17)
NetC16_2: C16.2 SW4.3 SW4.4 U5.33 | length 28.8
  Top Layer w0.254: v1(39.243,62.611) 39.276,62.644 39.276,64.149 38.401,65.024 36.471,65.024 36.222,65.273 36.222,67.359 37.095,68.232 37.095,70.467 37.658,71.03 47.374,71.03 48.264,70.14 C16.2
  Bottom Layer w0.254: U5.33 39.992,59.67 40.486,60.164 40.486,60.884 39.243,62.127 v1(39.243,62.611)
NetC17_2: C17.2 SW5.3 SW5.4 U5.38 | length 48.2
  Top Layer w0.254: v1(40.894,64.643) v1(40.894,65.839) ; v1(58.42,72.064) 66.52,72.064 67.554,71.03 SW5.4 SW5.3 77.374,71.03 79.338,69.066 80.112,69.066 C17.2
  Bottom Layer w0.254: v1(40.894,64.643) 40.898,64.639 40.898,62.632 U5.38 ; v1(40.894,65.839) 40.894,67.252 41.841,68.199 56.032,68.199 58.42,70.587 v1(58.42,72.064)
NetC18_2: C18.2 SW2.3 SW2.4 U5.10 | length 30.3
  Top Layer w0.254: v1(49.121,56.67) v1(49.121,61.209) ; v1(49.149,63.373) 49.149,64.135 51.435,66.421 51.435,67.945 52.094,68.604 52.094,70.467 52.657,71.03 SW2.4 SW2.3 62.374,71.03 63.264,70.14 C18.2
  Bottom Layer w0.254: U5.10 v1(49.121,56.67) ; v1(49.121,61.209) 49.121,63.345 v1(49.149,63.373)
NetD1_1: D1.1 P5.1 | length 18.6
  Top Layer w0.5: v2(47.325,95.423) v2(57.531,95.423)
  Bottom Layer w0.5: D1.1 v2(47.325,95.423) ; P5.1 v2(57.531,95.423)
NetP3_1: P3.1 R18.2 U5.44 | length 64.9
  Top Layer w0.254: v1(43.93,63.869) 45.061,62.738 49.403,62.738 51.372,64.707 54.039,64.707 v1(55.118,65.786) ; v1(55.118,67.183) v1(55.118,70.485) ; v1(55.118,71.755) 57.404,71.755 58.389,72.74 67.468,72.74 67.999,72.209 85.525,72.209 P3.1
  Bottom Layer w0.254: U5.44 v1(43.93,63.869) ; v1(55.118,65.786) v1(55.118,67.183) ; v1(55.118,70.485) v1(55.118,71.755) ; P3.1 87.122,69.342 88.392,68.072 88.392,60.728 88.243,60.579 87.583,60.579 R18.2
NetP7_1: P7.1 U2.3 | length 18.1
  Top Layer w0.254: v1(36.909,132.128) P7.1
  Bottom Layer w0.254: U2.3 36.194,117.855 36.909,118.57 v1(36.909,132.128)
NetP7_4: P7.4 U2.5 | length 17.9
  Bottom Layer w0.254: U2.5 38.734,117.903 39.253,118.422 39.253,131.736 39.646,132.128 P7.4
NetP8_1: P8.1 U2.10 | length 33.8
  Top Layer w0.254: v1(49.022,132.128) P8.1
  Bottom Layer w0.254: U2.10 38.734,109.496 38.883,109.347 46.079,109.347 46.228,109.496 46.228,128.143 49.022,130.937 v1@49.022,132.149
NetP8_4: P8.4 U2.12 | length 40.2
  Bottom Layer w0.254: U2.12 36.194,109.99 37.291,108.893 46.514,108.893 46.736,109.115 46.736,127.889 47.371,128.524 51.308,128.524 51.562,128.778 51.562,131.979 51.711,132.128 P8.4
NetP9_1: P9.1 U3.3 | length 41.7
  Top Layer w0.254: P9.1 62.193,133.083 62.701,133.591 63.351,133.591 63.5,133.74 63.5,135.133 63.649,135.282 79.153,135.282 79.302,135.133 79.302,118.418 78.105,117.221 v1(76.2,117.221)
  Bottom Layer w0.254: U3.3 76.197,115.657 76.197,117.218 v1(76.2,117.221)
NetP9_4: P9.4 U3.5 | length 50.2
  Top Layer w0.254: v1(63.023,134.097) 61.475,134.097 61.231,133.853 61.231,130.403 61.423,130.211 67.546,130.211 71.38,134.045 77.503,134.045 78.848,132.7 78.848,126.424 75.723,123.299 75.723,117.023 76.002,116.744 78.303,116.744 v1(78.76,117.201)
  Bottom Layer w0.254: v1(63.023,134.097) 63.023,134.085 63.119,133.989 63.119,133.985 63.513,133.591 64.225,133.591 64.733,133.083 P9.4 ; U3.5 78.737,115.657 78.737,117.166 78.76,117.189 v1(78.76,117.201)
NetP10_1: P10.1 U3.10 | length 39
  Top Layer w0.254: P10.1 74.622,131.699 v1(75.438,131.699)
  Bottom Layer w0.254: v1(75.438,131.699) 75.438,130.429 76.2,129.667 76.2,125.476 68.58,117.856 68.58,108.988 68.729,108.839 77.583,108.839 78.734,109.99 U3.10
NetP10_4: P10.4 U3.12 | length 33.8
  Bottom Layer w0.254: U3.12 76.194,109.99 75.551,109.347 69.364,109.347 69.215,109.496 69.215,117.771 76.733,125.289 P10.4
NetQ1_1: Q1.3 R17.2 U5.18 | length 99.6
  Top Layer w0.254: v1(43.432,52.961) 55.374,52.961 56.007,53.594 v1(76.798,53.594) ; v1(76.581,61.771) 76.581,64.262 77.109,64.79 81.935,64.79 81.935,71.606 82.084,71.755 83.404,71.755 83.427,71.732 v1(83.439,71.732)
  Bottom Layer w0.254: U5.18 43.43,52.963 v1@43.434,52.959 ; Q1.3 73.222,89.093 73.049,88.92 73.049,88.842 72.9,88.693 70.971,88.693 R17.2 70.231,88.312 70.231,76.349 70.38,76.2 82.082,76.2 83.535,74.747 83.535,71.828 v1(83.439,71.732) ; v1(76.581,61.771) 76.581,56.642 77.343,55.88 80.623,55.88 80.772,55.731 80.772,53.743 80.623,53.594 v1(76.798,53.594)
NetQ3_3: Q3.3 R21.2 | length 11.2
  Bottom Layer w0.6: Q3.3 75.341,49.657 75.692,50.008 75.692,54.179 76.043,54.53 R21.2
NetQ4_1: Q4.1 Q5.1 R25.2 R26.2 U5.21 | length 52.7
  Top Layer w0.254: v1@41.656,53.217 41.656,51.584 41.805,51.435 46.034,51.435 46.161,51.562 v1(46.228,51.562) ; v1(58.801,52.324) v1(59.944,52.324)
  Bottom Layer w0.254: v1(41.707,53.143) 41.707,53.162 41.656,53.213 41.917,53.474 41.917,54.227 U5.21 ; v1(46.228,51.562) 48.341,49.449 57.932,49.449 59.944,51.461 v1(59.944,52.324) ; v1(58.801,52.324) 58.801,56.261 61.578,59.038 61.578,64.592 62.731,65.746 62.731,66.673 62.745,66.686 62.745,66.824 62.911,66.99 Q4.1
  Bottom Layer w0.6: Q5.1 65.652,69.789 66.052,69.389 R26.2 R25.2 66.052,67.39 65.652,66.99 Q4.1
NetR1_1: R1.1 R13.2 U4.3 | length 46
  Top Layer w0.254: R1.1 29.618,111.84 29.469,111.691 v1(29.469,101.727) 33.528,101.727 36.322,98.933 v1(36.322,87.884)
  Bottom Layer w0.254: v1@29.481,101.727 29.668,101.54 R13.2 ; U4.3 35.687,80.366 35.106,79.785 34.028,79.785 33.79,80.022 33.79,83.32 34.544,84.074 36.173,84.074 36.322,84.223 v1(36.322,87.884)
NetR1_2: R1.2 U2.1 U2.2 | length 4.5
  Top Layer w0.254: R1.2 v1(31.464,115.545)
  Bottom Layer w0.254: v1@31.476,115.545 31.585,115.654 U2.1 U2.2
NetR2_2: R2.2 U2.6 U2.7 | length 4.5
  Top Layer w0.254: R2.2 v1@43.464,115.545
  Bottom Layer w0.254: U2.6 U2.7 43.349,115.654 v1@43.455,115.548
  other v1: 43.467,115.548
NetR3_1: R3.1 R14.2 U4.5 | length 41.2
  Top Layer w0.254: v1(33.147,79.502) 33.655,78.994 37.846,78.994 39.201,80.349 39.201,104.48 39.35,104.629 v1(43.464,104.629) R3.1
  Bottom Layer w0.254: v1(33.147,79.502) U4.5 ; R14.2@43.458,101.546 v1@43.458,104.629
NetR3_2: R3.2 U2.8 U2.9 | length 5.6
  Top Layer w0.254: R3.2 v1@43.464,110.592
  Bottom Layer w0.254: U2.9 U2.8 43.324,110.726 v1@43.458,110.592
  other v1: 43.47,110.592
NetR4_2: R4.2 U2.13 U2.14 | length 5.5
  Top Layer w0.254: R4.2 v1@31.464,110.592
  Bottom Layer w0.254: v1@31.483,110.592 31.617,110.726 U2.14 U2.13
  other v1: 31.47,110.592
NetR5_1: R5.1 R15.2 U4.10 | length 64.3
  Top Layer w0.254: v1@40.621,96.12 42.264,97.763 69.32,97.763 69.469,97.912 69.469,111.691 69.618,111.84 R5.1
  Bottom Layer w0.254: U4.10 33.147,87.757 34.036,88.646 34.036,95.758 34.398,96.12 v1(40.621,96.12) ; v1(69.469,101.727) 69.481,101.727 69.668,101.54 R15.2
NetR5_2: R5.2 U3.1 U3.2 | length 4.5
  Top Layer w0.254: R5.2 v1(71.464,115.545)
  Bottom Layer w0.254: v1(71.464,115.545) 71.476,115.545 71.585,115.654 U3.1 U3.2
NetR6_2: R6.2 U3.6 U3.7 | length 4.5
  Top Layer w0.254: R6.2 v1@83.464,115.545
  Bottom Layer w0.254: U3.6 U3.7 83.349,115.654 83.455,115.548 v1(83.467,115.548)
NetR7_1: R7.1 R16.1 U4.12 | length 119.9
  Top Layer w0.254: v1(35.052,86.106) 34.925,85.979 29.867,85.979 29.718,85.83 29.718,80.645 31.823,78.54 39.297,78.54 42.291,81.534 42.291,84.836 45.974,88.519 69.215,88.519 70.358,87.376 70.358,75.968 70.507,75.819 84.433,75.819 84.582,75.968 84.582,94.361 84.963,94.742 84.963,103.759 85.239,104.035 85.239,104.245 84.861,104.623 v1(83.47,104.623) 83.47,105.834 R7.1
  Bottom Layer w0.254: v1(35.052,86.106) 35.611,86.106 U4.12 ; R16.1 v1@83.464,104.623
NetR7_2: R7.2 U3.8 U3.9 | length 5.6
  Top Layer w0.254: R7.2 v1@83.464,110.592
  Bottom Layer w0.254: U3.9 U3.8 83.324,110.726 83.458,110.592 v1(83.47,110.592)
NetR8_2: R8.2 U3.13 U3.14 | length 5.6
  Top Layer w0.254: R8.2 v1@71.464,110.592
  Bottom Layer w0.254: v1(71.47,110.592) 71.483,110.592 71.617,110.726 U3.14 U3.13
NetR19_1: R19.1 R20.2 U6.1 | length 32.5
  Bottom Layer w0.254: U6.1 75.758,97.514 75.609,97.663 70.231,97.663 69.723,98.171 69.19,98.171 68.644,98.717 68.248,98.717 67.31,97.779 67.31,93.853 67.644,93.519 70.346,93.519 71.289,92.576 72.778,92.576 73.533,91.821 78.469,91.821 79.394,92.746 79.394,95.464 80.276,96.346 R19.1
NetR19_2: R19.2 U5.42 | length 77.5
  Top Layer w0.254: v1(43.053,66.04) 43.22,66.04 44.49,64.77 v1(48.641,64.77) ; v1(58.801,64.262) v1(63.627,64.262) ; v1(68.58,65.278) v1(70.739,65.278) ; v1(81.026,92.456) 83.947,89.535 v1(83.947,76.835)
  Bottom Layer w0.254: U5.42 42.93,64.004 42.799,64.135 42.799,65.786 v1(43.053,66.04) ; v1(48.641,64.77) 54.991,64.77 55.626,65.405 55.626,66.55 55.775,66.699 58.501,66.699 58.674,66.526 58.674,64.389 v1(58.801,64.262) ; v1(63.627,64.262) 63.976,63.913 68.196,63.913 68.58,64.297 v1(68.58,65.278) ; v1(70.739,65.278) 80.391,65.278 83.947,68.834 v1(83.947,76.835) ; v1(81.026,92.456) R19.2
PeriphPWR: C3.2 C4.2 C5.2 C19.1 P7.2 P8.2 P9.2 P10.2 Q4.3 U2.4 U3.4 U4.4 U6.5 | length 270.4
  Top Layer w0.6: v2(27.432,97.79) v2(27.432,99.703) ; P7.2 v2(43.121,132.128) ; v2(49.022,73.66) v2(49.022,75.946) ; P8.2 v2(55.121,132.128) ; P9.2 v2(67.121,132.128) ; P10.2 v2(78.221,132.128)
  Bottom Layer w0.254: C19.1 72.739,93.741 U6.5
  Bottom Layer w0.6: v2(27.432,97.79) 27.432,97.125 27.783,96.774 41.051,96.774 41.402,96.423 41.402,86.36 42.926,84.836 42.926,82.042 ; v2(27.432,99.703) 27.432,114.554 ; U4.4 34.417,81.967 35.541,83.091 38.894,83.091 39.943,82.042 42.926,82.042 ; U2.4 37.464,114.016 37.113,113.665 33.528,113.665 32.795,114.398 31.606,114.398 C4.2 31.45,114.554 27.432,114.554 ; v2(43.121,132.128) 43.121,134.747 ; v2(49.022,73.66) 58.916,73.66 59.267,73.309 59.267,66.32 59.589,65.998 61.163,65.998 Q4.3 ; v2(49.022,75.946) 42.926,82.042 ; v2(55.121,132.128) 55.121,134.747 ; v2(67.121,132.128) 67.121,134.747 ; C19.1 72.817,93.519 73.753,92.583 78.021,92.583 78.453,93.015 78.453,96.741 79.375,97.663 86.106,97.663 87.503,99.06 87.503,117.348 86.36,118.491 78.74,118.491 ; U3.4 77.464,114.016 77.113,113.665 73.528,113.665 72.795,114.398 71.606,114.398 C3.2 71.164,114.54 70.914,114.79 70.485,115.219 70.485,117.094 71.882,118.491 78.74,118.491 ; v2(78.221,132.128) 78.737,132.128 ; 27.432,114.554 35.56,122.682 35.56,134.396 35.911,134.747 43.121,134.747 ; 43.121,134.747 55.121,134.747 ; 55.121,134.747 67.121,134.747 ; 67.121,134.747 78.385,134.747 78.737,134.396 78.737,132.128 ; 78.737,132.128 78.74,132.125 78.74,118.491
SWDCLK: P2.2 U5.37 | length 66.8
  Top Layer w0.254: v1(83.058,74.168) v1(85.725,74.168)
  Bottom Layer w0.254: U5.37 40.43,63.24 40.297,63.373 38.376,63.373 38.227,63.522 38.227,67.198 45.216,74.187 63.938,74.187 63.957,74.168 v1(83.058,74.168) ; v1(85.725,74.168) 85.725,81.915 P2.2
SWDIO: P2.3 U5.34 | length 73.6
  Top Layer w0.254: v1(82.804,74.803) 84.934,74.803 86.039,75.909 86.039,79.689 P2.3
  Bottom Layer w0.254: U5.34 38.987,60.157 38.122,60.157 37.973,60.008 37.973,59.055 36.576,57.658 35.56,57.658 34.544,58.674 34.544,64.157 44.936,74.549 82.55,74.549 v1(82.804,74.803)
V3.3: C2.2 C18.1 C20.2 C21.2 C22.2 D1.2 J1.1 P2.4 P3.2 Q5.2 R26.1 R27.1 SW2.1 SW2.2 U1.2 U5.24 U5.36 U5.48 | length 216.2
  Top Layer w0.28: v1(33.528,68.58) 33.528,64.48 34.082,63.927 ; SW2.2 60.071,66.55 ; v1(60.071,67.183) 60.071,66.55 ; C18.1 64.714,67.44 63.824,66.55 60.071,66.55
  Top Layer w0.6: v1(38.749,63.931) v1(36.703,63.931) 36.603,63.831 34.178,63.831 34.082,63.927 30.592,60.437 30.592,52.339 32.087,50.844 v1(39.445,50.844) 60.006,50.844 v2(62.112,52.95) ; v2(44.196,85.09) 45.339,85.09 47.498,87.249 68.864,87.249 69.215,86.898 v2@69.215,73.152 ; v2(69.215,73.133) v2@69.215,73.152 ; P3.2 v2@69.215,73.152
  Bottom Layer w0.28: v1(33.528,68.58) R27.1 ; v1@36.703,63.93 C20.2 37.003,62.31 37.413,61.9 37.413,61.6 37.843,61.17 U5.36 ; v1(38.749,63.931) 38.749,64.911 39.116,65.278 41.378,65.278 41.378,65.631 41.384,65.636 41.384,67.223 41.707,67.546 46.146,67.546 46.816,66.876 C22.2 46.816,64.978 45.93,64.092 U5.48 ; v1(39.445,50.844) 39.445,51.788 C21.2 39.29,52.243 39.7,52.653 40.266,52.653 40.43,52.817 U5.24 ; v1(60.071,67.183) 60.071,69.804 59.835,70.04 59.835,70.868 60.656,71.689 Q5.2
  Bottom Layer w0.559: C2.2@65.407,56.945 73.23,56.945 73.584,56.591 U1.2
  Bottom Layer w0.6: v2(44.196,85.09) D1.2 ; Q5.2 65.652,71.689 66.052,72.089 R26.1 67.552,72.089 68.615,73.152 69.215,73.152 v2(69.215,73.133) 69.469,72.879 69.469,63.724 69.118,63.373 64.897,63.373 63.881,62.357 63.881,54.408 63.829,54.356 ; v2@62.105,52.957 J1.1 63.829,54.356 ; C2.2@65.407,56.945 C2.2 65.405,54.78 64.981,54.356 63.829,54.356 ; U1.2@73.582,54.917 U1.2
  Bottom Layer w1.5: P3.2 P2.4
VDDA: C6.2 J1.2 Q4.2 R25.1 U5.9 | length 41.1
  Bottom Layer w0.28: U5.9 49.551,57.17 50.079,56.642 53.176,56.642 53.34,56.478 53.34,55.245 52.705,54.61 52.705,54.602 52.153,54.05 51.511,54.05 51.101,53.64 C6.2 51.101,51.091 51.265,50.927 58.891,50.927 59.436,51.472 59.436,55.137 61.355,57.056 J1.2
  Bottom Layer w0.6: J1.2 62.105,64.285 62.91,65.09 Q4.2 65.652,65.09 66.052,64.69 R25.1
virtZero: R13.1 R14.1 R15.1 R16.2 U5.14 U6.3 U6.4 | length 143
  Top Layer w0.254: v1(46.643,98.84) 67.684,98.84 67.745,98.901 v1(67.757,98.901)
  Bottom Layer w0.254: U5.14 45.435,54.235 45.435,49.967 45.04,49.572 44.467,49.572 44.325,49.43 38.899,49.43 37.465,50.864 37.465,52.964 37.316,53.113 35.206,53.113 34.671,52.578 34.671,49.022 33.147,47.498 27.686,47.498 26.434,48.75 26.434,71.798 26.447,71.811 26.447,72.207 26.321,72.333 26.321,97.424 27.711,98.814 31.438,98.814 R13.1 R14.1 v1(46.643,98.84) ; v1(67.757,98.901) 67.77,98.901 68.04,99.171 69.01,99.171 69.341,98.84 77.667,98.84 ; U6.4 U6.3 77.658,98.831 77.667,98.84 ; R16.2 77.667,98.84
Vpp: C1.2 P1.2 Q3.2 R24.1 U1.3 | length 31.4
  Top Layer w0.5: v3(74.295,51.943) 83.352,51.943 P1.2
  Bottom Layer w0.254: C1.2 C1.2@84.475,53.367
  Bottom Layer w0.5: R24.1 69.224,48.697 74.167,48.697 Q3.2 82.362,48.707 P1.2 C1.2@84.475,53.367 ; U1.3 72.644,52.549 72.673,52.578 73.533,52.578 74.168,51.943 v3(74.295,51.943)
pads on no net: U5.1 U5.2 U5.3 U5.4 U5.16 U5.22 U5.25 U5.26 U5.27 U5.28 U5.29 U5.43 U5.45 U5.46
copper on no net: | length 612.8
  Top Layer w0.254: 25.464,46.79 89.464,46.79 89.464,127.19 80.464,127.19 80.464,135.99 34.464,135.99 34.464,127.19 25.464,127.19 25.464,46.79
  Bottom Layer w0.254: 25.464,46.79 25.464,127.19 34.464,127.19 34.464,135.99 80.464,135.99 80.464,127.19 89.464,127.19 89.464,46.79 25.464,46.79

## Polygon pours and split planes (outlines as drawn)
GND on Bottom Layer "GND_L02_P021" (solid, pour order 21): 25.464,127.19 34.464,127.19 34.464,135.99 80.464,135.99 80.464,127.19 89.464,127.19 89.464,46.79 25.464,46.79
no net on Bottom Layer "NONET_L02_P006" (solid, pour order 6): 40.386,61.214
no net on Bottom Layer "NONET_L02_P005" (solid, pour order 5): 40.132,55.245
GND on Top Layer "GND_L01_P023" (solid, pour order 23): 25.464,127.19 34.464,127.19 34.464,135.99 80.464,135.99 80.464,127.19 89.464,127.19 89.464,46.79 25.464,46.79
GND on Top Layer "GND_L01_P013" (solid, pour order 13): 46.99,62.23 46.99,54.61 39.37,54.61 39.37,54.864 39.37,62.23
GNDA on Top Layer "GNDA_L01_P010" (solid, pour order 10): 30.093,81.567 30.086,81.574 30.086,85.545 38.732,85.545 38.729,85.542 38.729,81.567
GNDA on Top Layer "GNDA_L01_P008" (solid, pour order 8): 81.788,115.189 81.795,115.182 81.795,111.211 73.149,111.211 73.152,111.214 73.152,115.189
GNDA on Top Layer "GNDA_L01_P009" (solid, pour order 9): 41.788,115.189 41.795,115.182 41.795,111.211 33.149,111.211 33.152,111.214 33.152,115.189
GND on Top Layer "GND_L01_P007" (solid, pour order 7): 0,66.167

## Other copper
Top Layer:
  text "Rev 1.02" at 26.416,118.872 h1
  text "CarbSynch by Harakivi" at 52.07,47.752 h1.52

## Silkscreen, mask and mechanical layers (free items; w line width, h text height)
Top Overlay:
  text "GND" at 81.407,85.09 h1.52
  text "SWDCLK" at 76.835,82.55 h1.52
  text "SWDIO" at 78.613,80.01 h1.52
  text "3.3V" at 80.137,77.47 h1.52
  text "3.3V" at 80.01,72.39 h1.52
  text "BOOT0" at 78.359,69.85 h1.52
  text "+ -" at 83.693,47.625 h1.52
Bottom Overlay:
  text "+ -" at 83.693,47.625 h1.52

## Text inside footprints (layer, text, board x,y; h text height)
P5: Bottom Overlay "-" at 56.931,118.113 h1.42 r270; Bottom Overlay "+" at 56.931,92.263 h1.42 r270